# Altium PCB ESE516_PCB.PcbDoc
Units mil, origin at the board's own origin, x right, y up, seen from the top; angles counter-clockwise.
Board outline 2362.21 x 2362.21 mil, 4 copper layers (Top Layer, GroundPlane, PowerPlane, Bottom Layer), stack 58.4 mil thick; 112 components, 64 nets, 330 pads, 6 vias.
Unrouted connection lines stored in the file: 214.
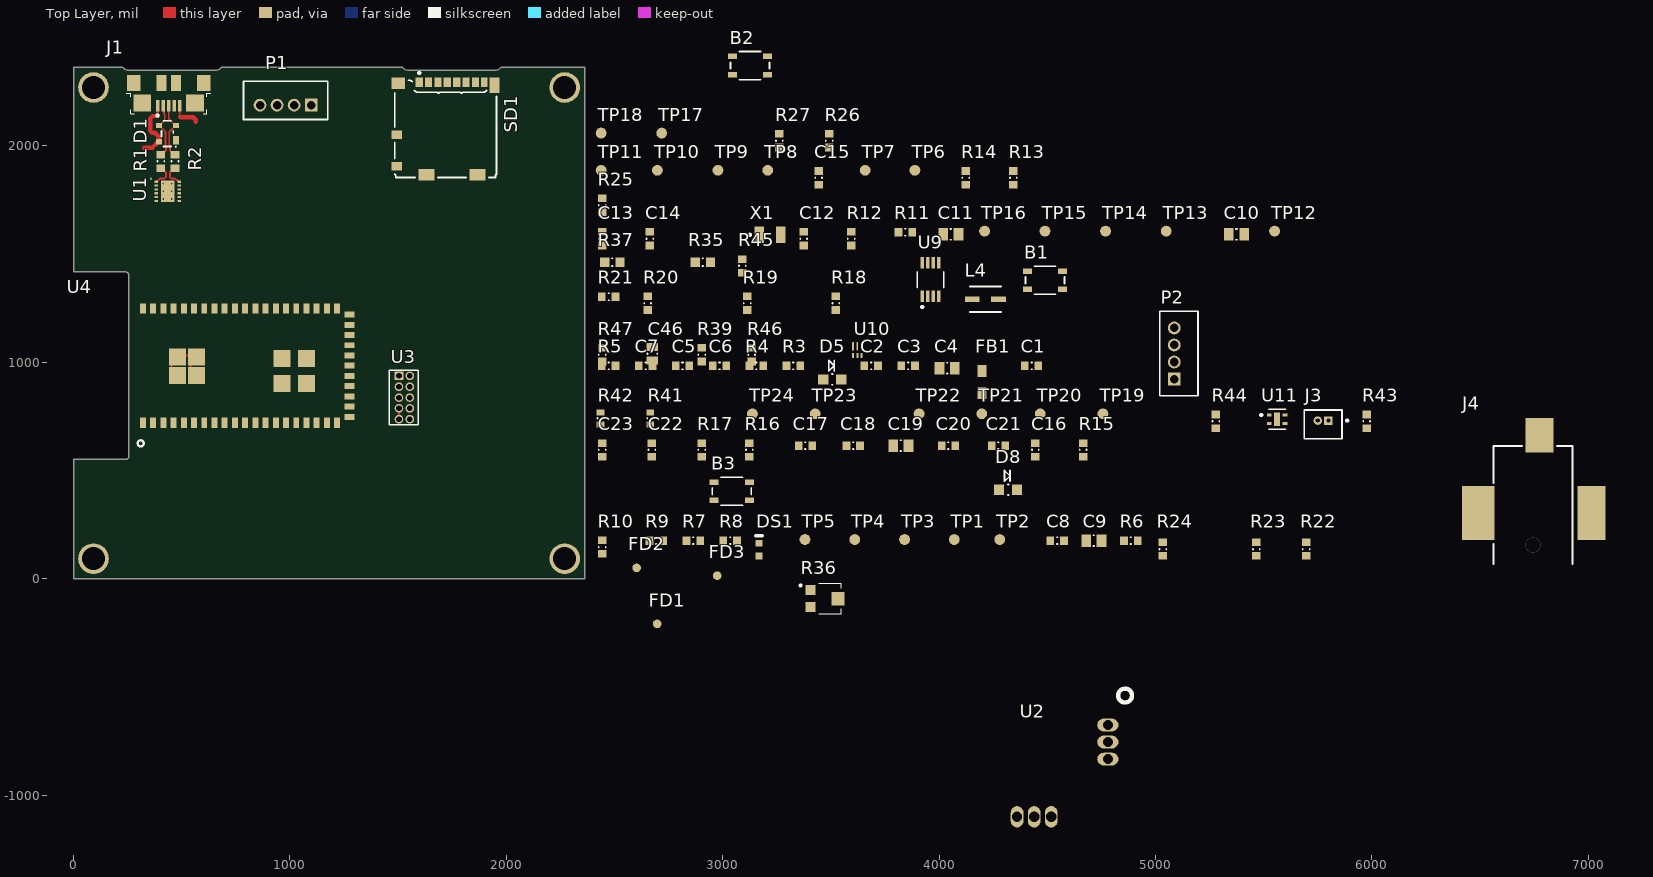
[diagram p0: Top Layer view]
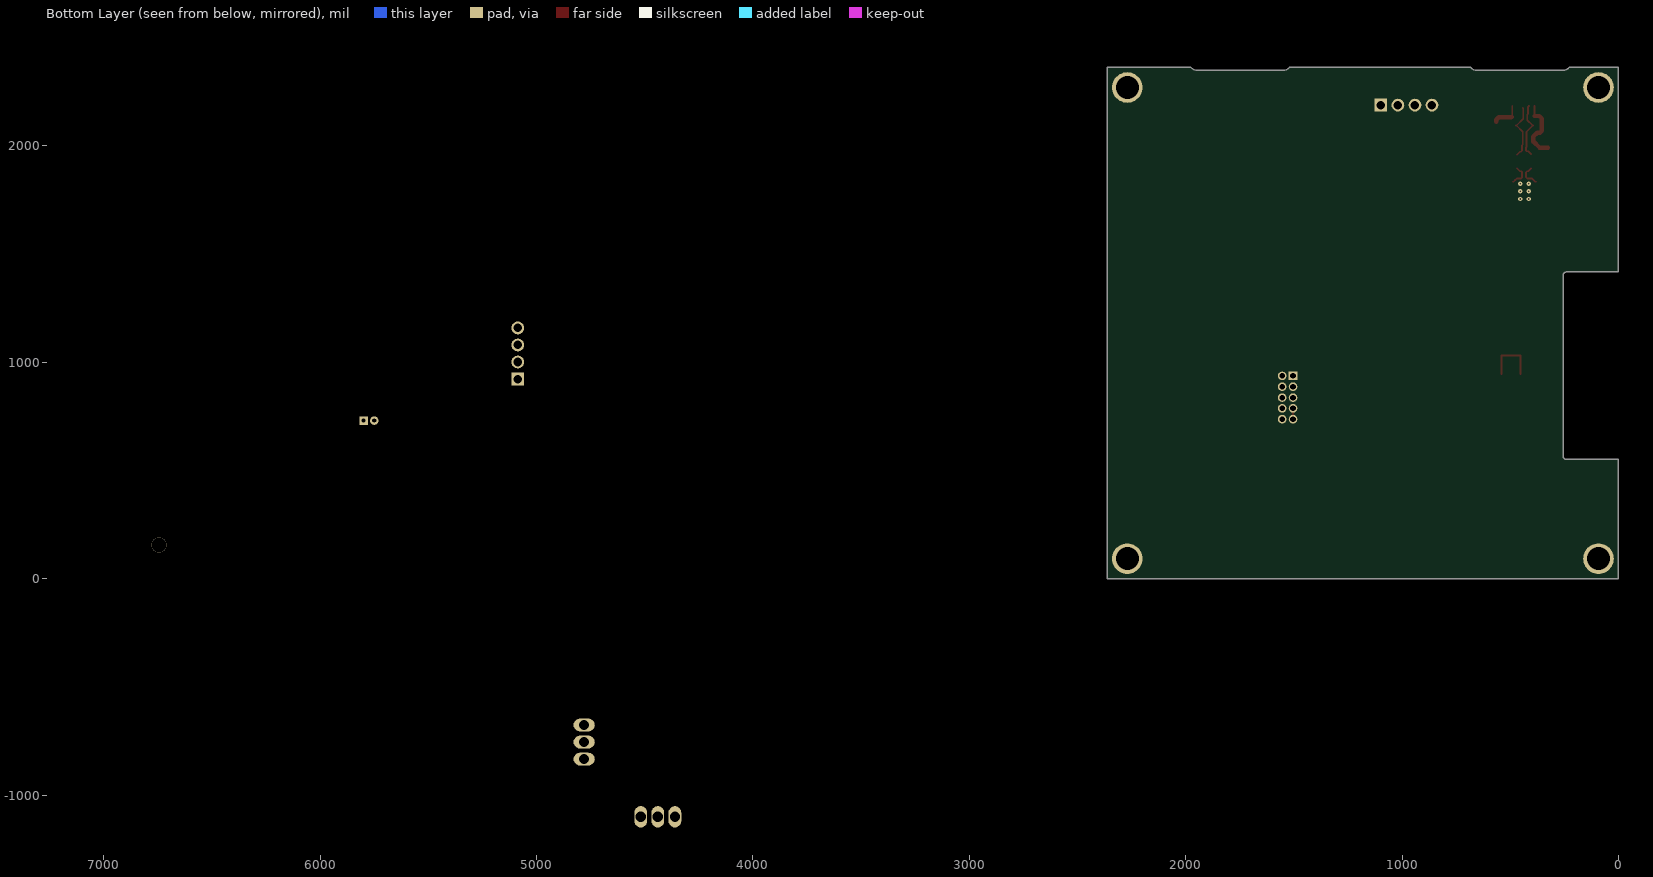
[diagram p1: Bottom Layer view, seen from below]

## Layer stack, top to bottom
Top Solder: solder mask 1, Solder Resist, Dk 3.5
Top Layer: signal copper 1.5
Dielectric1: prepreg 13, PP-006, Dk 4.1
GroundPlane: signal copper 0.7
Dielectric 2: core 28, Core-009, Dk 4.5
PowerPlane: signal copper 0.7
Dielectric 3: prepreg 13, PP-006, Dk 4.1
Bottom Layer: signal copper 1.5
Bottom Solder: solder mask 1, Solder Resist, Dk 3.5

## Board outline
240.16,551.18 0,551.18 0,0 2362.21,0 2362.2,2362.2 1975.39,2362.2 1969.06,2356.37 1961.63,2352.01 1953.45,2349.32 1944.88,2348.42 1551.18,2348.42 1542.62,2349.33 1534.45,2352.01 1527.02,2356.35 1520.67,2362.16 682.72,2362.2 676.38,2356.37 668.95,2352.01 660.77,2349.32 652.2,2348.42 258.5,2348.42 249.95,2349.33 241.77,2352.01 234.34,2356.35 227.99,2362.16 0,2362.2 0,1417.32 240.16,1417.32 243.66,1416.93 246.99,1415.77 249.98,1413.89 252.48,1411.4 254.35,1408.41 255.51,1405.08 255.91,1401.57 255.91,566.93 255.51,563.42 254.35,560.09 252.48,557.1 249.98,554.61 246.99,552.73 243.66,551.57

## Design rules (kind name [scope] priority, off if disabled: settings)
AcuteAngle [All] p1: minimum=6.00000000000000E+0001 checktracksonly=TRUE
AssemblyTestPointUsage [All] p1 off: allowmultiple=TRUE
AssemblyTestpoint [All] p1 off: testpointundercomponent=TRUE minsize=30 maxsize=100 preferedsize=60 minholesize=0 maxholesize=40 preferedholesize=32 testpointgrid=1 usegrid=FALSE gridtolerance=0.01 allowsidebottom=TRUE
BoardOutlineClearance "BoardOutlineClearance_Inner Layer" [OnLayer('GroundPlane')OR OnLayer('PowerPlane')] p1: gap=20 ignorepadtopadclearanceinfootprint=FALSE
BoardOutlineClearance BoardOutlineClearance_OuterLayers [All] p2: gap=10 ignorepadtopadclearanceinfootprint=FALSE except(20: SMDPad-OutlineEdge SMDPad-CavityEdge SMDPad-CutoutEdge THPad-OutlineEdge THPad-CavityEdge THPad-CutoutEdge)
Clearance [All] p1: gap=6 ignorepadtopadclearanceinfootprint=FALSE except(10: SMDPad-THPad)
DiffPairsRouting [All] p1: maxlimit=10 minlimit=6 mostfreqgap=10 toplayer_minwidth=6 toplayer_maxwidth=25 toplayer_prefwidth=15 midlayer1_minwidth=6 midlayer1_maxwidth=25 midlayer1_prefwidth=15 midlayer2_minwidth=6 midlayer2_maxwidth=25 midlayer2_prefwidth=15 bottomlayer_minwidth=6 bottomlayer_maxwidth=25 bottomlayer_prefwidth=15 maxuncoupledlength=500
FabricationTestPointUsage [All] p1 off: valid=0 allowmultiple=TRUE
FabricationTestpoint [All] p1 off: side=2 testpointundercomponent=TRUE minsize=30 maxsize=100 preferedsize=60 minholesize=0 maxholesize=40 preferedholesize=32 testpointgrid=1 allowsidebottom=TRUE usegrid=FALSE gridtolerance=0.01
HoleSize [All] p1: absolutevalues=TRUE maxlimit=150 minlimit=8 maxpercent=80.000 minpercent=20.000
MinimumAnnularRing [All] p1: minimumring=6
MinimumSolderMaskSliver [All] p1: minsoldermaskwidth=2
PlaneClearance [All] p1: clearance=10
PlaneConnect [All] p1: pad.planeconnectstyle=Relief pad.reliefexpansion=20 pad.reliefentries=4 pad.reliefconductorwidth=10 pad.reliefairgap=10 via.planeconnectstyle=Direct via.reliefexpansion=20 via.reliefentries=4 via.reliefconductorwidth=10 via.reliefairgap=10
PolygonConnect [All] p1: thpad.connectstyle=Relief thpad.reliefconductorwidth=10 thpad.reliefentries=4 thpad.polygonreliefangle="90 Angle" thpad.airgapwidth=8 smdpad.connectstyle=Relief smdpad.reliefconductorwidth=10 smdpad.reliefentries=4 smdpad.polygonreliefangle="90 Angle" smdpad.airgapwidth=8 via.connectstyle=Direct via.reliefconductorwidth=10 via.reliefentries=4 via.polygonreliefangle="90 Angle" via.airgapwidth=8
RoutingVias [All] p1: holewidth=8 width=20 viastyle="Through Hole" minholewidth=8 minwidth=20 maxholewidth=30 maxwidth=50
SMDNeckDown [All] p1: percent=90.000
SMDToCorner [All] p1: distance=0
SMDToPlane [All] p1: distance=0
SilkToSilkClearance [All] p1: silktosilkclearance=0
SilkToSolderMaskClearance [IsPad] p1: minsilkscreentomaskgap=2 clearancetoexposedcopper=TRUE
SolderMaskExpansion [All] p1: expansion=2 istentingtop=FALSE
UnRoutedNet [All] p1: checkbadconnections=TRUE
ViasUnderSMD [All] p1: allowed=FALSE
Width [All] p1: maxlimit=1000 minlimit=6 preferedwidth=10
18 further rules are at their usual default settings.

## Classes and differential pairs
differential pair USB_FTDI_DATA: +USB_FTDI_DATA_P -USB_FTDI_DATA_N
differential pair USB_DATA: +USB_DATA_P -USB_DATA_N

## Components (designator, comment, footprint, x,y, rotation, side; value= is the part's Value field where it differs from the comment)
B1 "PTS810 SJK 250 SMTR LFS" "PTS810 SJK 250 SMTR LFS" 4489,1379 r0 top
B2 "PTS810 SJK 250 SMTR LFS" "PTS810 SJK 250 SMTR LFS" 3126,2371 r0 top
B3 "PTS810 SJK 250 SMTR LFS" "PTS810 SJK 250 SMTR LFS" 3041.31,404.32 r0 top
C1 "100nF 16V" CAPC0603(1608)100_N 4427,983 r0 top value=100nF
C2 "10nF 16V" CAPC0603(1608)100_N 3686,983 r0 top value=10nF
C3 "100nF 16V" CAPC0603(1608)100_N 3857,983 r0 top value=100nF
C4 "4.7uF 16V" CAPC0805(2012)145_N 4037,973 r0 top value=4.7uF
C5 "47pF 16V" CAPC0603(1608)100_N 2814,983 r0 top value=47pF
C6 "47pF 16V" CAPC0603(1608)100_N 2985,983 r0 top value=47pF
C7 "100nF 16V" CAPC0603(1608)100_N 2644,983 r0 top value=100nF
C8 "CAP 120pF" CAPC0603(1608)100_N 4545,176 r0 top value=120pF
C9 "4.7uF 16V" CAPC0805(2012)145_N 4715,176 r0 top value=4.7uF
C10 "10uF 16V" CAPC0805(2012)145_N 5374,1591 r0 top value=10uF
C11 "CAP 10uF 16V" CAPC0805(2012)145_N 4054,1591 r0 top value=10uF
C12 "1uF 16V" CAPC0603(1608)100_N 3374,1571 r90 top value=1uF
C13 "18pF 16V" CAPC0603(1608)100_N 2443,1571 r90 top value=18pF
C14 "18pF 16V" CAPC0603(1608)100_N 2663,1571 r90 top value=18pF
C15 "CAP 100nF 16V 0603(1608)" CAPC0603(1608)100_N 3443,1852 r90 top value=100nF
C16 "1uF 16V" CAPC0603(1608)100_N 4445,595 r90 top value=1uF
C17 "1uF 16V" CAPC0603(1608)100_N 3382,615 r0 top value=1uF
C18 "100nF 16V" CAPC0603(1608)100_N 3603,615 r0 top value=100nF
C19 "CAP 10uF" CAPC0805(2012)145_N 3823,615 r0 top value=10uF
C20 "100nF 16V" CAPC0603(1608)100_N 4043,615 r0 top value=100nF
C21 "1uF 16V" CAPC0603(1608)100_N 4274,615 r0 top value=1uF
C22 "100nF 16V" CAPC0603(1608)100_N 2673,595 r90 top value=100nF
C23 "1uF 16V" CAPC0603(1608)100_N 2443,595 r90 top value=1uF
C46 "CAP 22uF" CAPC0805(2012)100_L 2675,1039 r90 top value=22uF
D1 "PRTR5V0U2X,215" NXP-SOT143B-4_V 433.88,2056.53 r180 top
D5 "LTST-C170CKT" LTST-C170CKT_V 3506,921 r0 top
D8 "LTST-C170GKT" LTST-C170GKT_V 4318.34,411 r0 top
DS1 "LTST-C191KGKT" LITE-ON-LTST-C191KRKT-2_V 3168,134 r90 top
FB1 "BLM21PG221SN1D" MURA-BLM21-B20-CHIP-2_V2 4198,909 r90 top
FD1 "40x100mm" Fiducial_FT 2697,-209 r0 top
FD2 "40x100mm" Fiducial_FT 2602,50 r0 top
FD3 "40x100mm" Fiducial_FT 2974,14 r0 top
J1 "ZX62R-B-5P" HIRO-ZX62R-B-5P_V 439.58,2237.34 r180 top
J3 "53047-0210" FP-53047-0210-MFG 5774,713 r0 top
J4 "RASM722PTR13X" FP-RASM722PTR13X-MFG 6744,323 r0 top
L4 "470nH 15mohm" INDPM3630X150N 4214,1291 r0 top
P1 "B4B-PH-K-S(LF)(SN)" JST-B4B-PH-K-S_V 980,2210 r180 top
P2 "B4B-PH-K-S(LF)(SN)" JST-B4B-PH-K-S_V 5107.65,1040.63 r90 top
R1 "27R 1%" RESC0603(1608)_N 404,1928 r270 top value="27.00 Ohm"
R2 "27R 1%" RESC0603(1608)_N 469,1928 r270 top value="27.00 Ohm"
R3 "1K 1%" RESC0603(1608)_N 3326,983 r0 top value="1000.00 Ohm"
R4 "Jumper" RESC0603(1608)_N 3155,983 r0 top value="0.00 Ohm"
R5 "1K 1%" RESC0603(1608)_N 2473,983 r0 top value="1000.00 Ohm"
R6 "1K1 1%" RESC0603(1608)_N 4886,176 r0 top value="1100.00 Ohm"
R7 "1K 1%" RESC0603(1608)_N 2864,176 r0 top value="1000.00 Ohm"
R8 "27R 1%" RESC0603(1608)_N 3034,176 r0 top value="27.00 Ohm"
R9 "27R 1%" RESC0603(1608)_N 2693,176 r0 top value="27.00 Ohm"
R10 "27R 1%" RESC0603(1608)_N 2443,146 r90 top value="27.00 Ohm"
R11 "10K 1%" RESC0603(1608)_N 3844,1601 r0 top value="10000.00 Ohm"
R12 "100R 1%" RESC0603(1608)_N 3594,1571 r90 top value="100.00 Ohm"
R13 "10K 1% 0603(1608)" RESC0603(1608)_N 4343,1852 r90 top value="10000.00 Ohm"
R14 "10K 1% 0603(1608)" RESC0603(1608)_N 4123,1852 r90 top value="10000.00 Ohm"
R15 "Jumper" RESC0603(1608)_N 4665,595 r90 top value="0.00 Ohm"
R16 "Jumper" RESC0603(1608)_N 3123,595 r90 top value="0.00 Ohm"
R17 "Jumper" RESC0603(1608)_N 2903,595 r90 top value="0.00 Ohm"
R18 "10K 1%" RESC0603(1608)_N 3523,1273 r90 top value="10000.00 Ohm"
R19 "100R 1%" RESC0603(1608)_N 3113,1273 r90 top value="100.00 Ohm"
R20 "10K 1%" RESC0603(1608)_N 2653,1273 r90 top value="10000.00 Ohm"
R21 "10K 1%" RESC0603(1608)_N 2473,1303 r0 top value="10000.00 Ohm"
R22 "1K1 1%" RESC0603(1608)_N 5696,137 r90 top value="1100.00 Ohm"
R23 "1K1 1%" RESC0603(1608)_N 5466,137 r90 top value="1100.00 Ohm"
R24 "Jumper" RESC0603(1608)_N 5034,137 r90 top value="0.00 Ohm"
R25 "1K1 1%" RESC0603(1608)_N 2443,1726 r90 top value="1100.00 Ohm"
R26 "10K 1%" RESC0603(1608)_N 3492,2024 r90 top value="10000.00 Ohm"
R27 "100R 1%" RESC0603(1608)_N 3262,2024 r90 top value="100.00 Ohm"
R35 "100R 1%" RESC0603(1608)_M 2908,1463 r0 top value="100.00 Ohm"
R36 "TC33X-2-102E" TRIM_TC33X-2-102E 3476,-92 r0 top
R37 "100R 1%" RESC0603(1608)_M 2490,1463 r0 top value="100.00 Ohm"
R39 "453K 1%" RESC0603(1608)_N 2903,1035 r90 top value="453000.00 Ohm"
R41 "2K2 1%" RESC0603(1608)_L 2665,741 r90 top value="2200.00 Ohm"
R42 "2K2 1%" RESC0603(1608)_L 2435,741 r90 top value="2200.00 Ohm"
R43 "Jumper" RESC0603(1608)_N 5975,727 r90 top value="0.00 Ohm"
R44 "Jumper" RESC0603(1608)_N 5279,727 r90 top value="0.00 Ohm"
R45 "Jumper" RESC0603(1608)_N 3091,1445 r90 top value="0.00 Ohm"
R46 "100K 1%" RESC0603(1608)_N 3133,1035 r90 top value="100000.00 Ohm"
R47 "100K 1%" RESC0603(1608)_N 2443,1035 r90 top value="100000.00 Ohm"
SD1 "104031-0811" MOLX-104031-0811_V 1720,2080 r180 top locked
TP1 "0.1\" Pad" PCBComponent 4070,181 r90 top
TP2 "0.1\" Pad" PCBComponent 4280,181 r90 top
TP3 "0.1\" Pad" PCBComponent 3840,181 r90 top
TP4 "0.1\" Pad" PCBComponent 3610,181 r90 top
TP5 "0.1\" Pad" PCBComponent 3380,181 r90 top
TP6 "0.1\" Pad" PCBComponent 3888,1887 r90 top
TP7 "0.1\" Pad" PCBComponent 3658,1887 r90 top
TP8 "0.1\" Pad" PCBComponent 3208,1887 r90 top
TP9 "0.1\" Pad" PCBComponent 2978,1887 r90 top
TP10 "0.1\" Pad" PCBComponent 2698,1887 r90 top
TP11 "0.1\" Pad" PCBComponent 2438,1887 r90 top
TP12 "0.1\" Pad" PCBComponent 5550,1606 r90 top
TP13 "0.1\" Pad" PCBComponent 5049,1606 r90 top
TP14 "0.1\" Pad" PCBComponent 4769,1606 r90 top
TP15 "0.1\" Pad" PCBComponent 4489,1606 r90 top
TP16 "0.1\" Pad" PCBComponent 4210,1606 r90 top
TP17 "0.1\" Pad" PCBComponent 2718,2059 r90 top
TP18 "0.1\" Pad" PCBComponent 2438,2059 r90 top
TP19 "0.1\" Pad" PCBComponent 4757,762 r90 top
TP20 "0.1\" Pad" PCBComponent 4467,762 r90 top
TP21 "0.1\" Pad" PCBComponent 4197,762 r90 top
TP22 "0.1\" Pad" PCBComponent 3907,762 r90 top
TP23 "0.1\" Pad" PCBComponent 3427,762 r90 top
TP24 "0.1\" Pad" PCBComponent 3137,762 r90 top
U1 "FT234XD-R" DFN-12_V 434.85,1789.71 r0 top
U2 "2 axis joystick" JOYSTICK 4439,-755 r0 top
U3 "20021111-00010T4LF" 20021111-00010T4LF 1554,837 r270 top
U4 "SAMW25H18-MR510PB" SAMW25H18-MR510PB 797.83,984.25 r180 top locked
U9 "PAM8302AASCR" FP-MSOP-8-MFG 3960,1382 r90 top
U10 "TPS62827DMQR" TPS62827DMQR 3622,1056 r90 top
U11 "SHTC3" FP-SHTC3-MFG 5562,737 r0 top
X1 "ABS07-32.768KHz-T" ABRA-ABS07-2_V 3218,1589 r0 top

## Footprints (in the part's own frame and the unit in brackets; to place one, negate y for a bottom-side part, rotate by r counter-clockwise, add the part's x,y. Pads: shape width x height; smd on the part's side, far side on the other; paste and mask are expansions set on the pad)
20021111-00010T4LF [mil] "CONN HEADER 10POS UNSHD VERT T/H"
  rect 39.6x39.6 hole 25.6: 1(-100,-50)
  round 39.6 hole 25.6: 2(-100,0) 3(-50,-50) 4(-50,0) 5(0,-50) 6(0,0) 7(50,-50) 8(50,0) 9(100,-50) 10(100,0)
  silkscreen extent -125,-95 125,40, body extent -125,-92 125,42, height 217
ABRA-ABS07-2_V [mm] "Hand Drawn, 2-Leads, Body 3.2x1.5mm, Pitch 2.5mm"
  rect 1.1x1.9 smd: 1(-1.25,0) 2(1.25,0)
  silkscreen extent -2.47,-0.12 -2.22,0.12, body extent -1.6,-0.75 1.6,0.75, height 0.9
CAPC0603(1608)100_N [mm] "Chip Capacitor, Body 1.6x0.8mm, Height 1.0mm, IPC Medium Density"
  rect 0.9x1 smd: 1(-0.8,0) 2(0.8,0)
  silkscreen extent -0.05,-0.4 0.05,0.4, body extent -0.87,-0.48 0.88,0.47, height 1
CAPC0805(2012)100_L [mm] "Chip Capacitor, Body 2.0x1.2mm, Height 1.0mm, IPC High Density"
  rect 0.95x1.35 smd: 1(-0.8,0) 2(0.8,0)
  silkscreen extent -0.05,-0.58 0.05,0.58, body extent -1.1,-0.72 1.1,0.72, height 1
CAPC0805(2012)145_N [mm] "Chip Capacitor, Body 2.0x1.2mm, Height 1.45mm, IPC Medium Density"
  rect 1.15x1.45 smd: 1(-0.9,0) 2(0.9,0)
  silkscreen extent -0.05,-0.62 0.05,0.63, body extent -1.1,-0.72 1.1,0.73, height 1.45
DFN-12_V [mm] "SON, 12-Leads, Body 3x3mm, Pitch 0.45mm, Thermal Pad 2.5x1.6mm"
  rect 0.4x0.25 smd: 1(-1.35,1.125) 2(-1.35,0.675) 3(-1.35,0.225) 4(-1.35,-0.225) 5(-1.35,-0.675) 6(-1.35,-1.125) 7(1.35,-1.125) 8(1.35,-0.675) 9(1.35,-0.225) 10(1.35,0.225) 11(1.35,0.675) 12(1.35,1.125)
  rect 1.6x2.5 smd mask+0.102: 13(0,0)
  silkscreen extent -2,1.45 -1.9,1.55, body extent -1.5,-1.5 1.5,1.5, height 0.9
Fiducial_FT [mil]
  round 40 smd paste-30 mask+30: ""(0,0)
FP-53047-0210-MFG [mm]
  rect 1x1 hole 0.5 paste-1000 mask+0: 1(0.625,0.45)
  round 1 hole 0.5 paste-1000 mask+0: 2(-0.625,0.45)
  silkscreen extent -2.22,-1.7 2.95,1.7, body extent -2.32,-1.8 2.32,1.8, height 0.25
FP-MSOP-8-MFG [mm]
  rect 1.35x0.45 smd paste+0 mask+0: 1(-1.975,0.975) 2(-1.975,0.325) 3(-1.975,-0.325) 4(-1.975,-0.975) 5(1.975,-0.975) 6(1.975,-0.325) 7(1.975,0.325) 8(1.975,0.975)
  silkscreen extent -3.35,-1.55 0.92,1.55, body extent -2.75,-1.65 2.75,1.65, height 0.25
FP-RASM722PTR13X-MFG [mm]
  rect 3.3x4.06 smd paste+0 mask+0: 1(0.76,8.65)
  rect 3.81x6.35 smd paste+0 mask+0: 2(-6.43,-0.49)
  rect 3.3x6.35 smd paste+0 mask+0: 3(6.86,-0.49)
  round 1.78 hole 1.78 unplated paste-1000 mask+0: ""(0,-4.25)
  silkscreen extent -4.63,-6.5 4.63,7.38, body extent -8.43,-7.48 8.61,10.78, height 0.25
FP-SHTC3-MFG [mm]
  rect 0.55x0.35 smd paste-1000 mask-1000: 1(-0.925,0.5) 2(-0.925,-0.5) 3(0.925,-0.5) 4(0.925,0.5)
  rect 0.7x1.6 smd paste-1000 mask+0: 5(0,0)
  silkscreen extent -2,-1.17 1,1.17, body extent -1.4,-1.1 1.4,1.1, height 0.25
HIRO-ZX62R-B-5P_V [mm] "USB Micro-B R/A Connector"
  rect 0.4x1.35 smd: 1(1.3,1.338) 2(0.65,1.338) 3(0,1.338) 4(-0.65,1.338) 5(-1.3,1.338)
  rect 2.1x2 smd: 6(-3.1,1.012) 11(3.1,1.012)
  rect 1.6x1.9 smd: 7(-4.1,-1.338) 10(4.1,-1.338)
  rect 1.2x1.9 smd: 8(-0.85,-1.338) 9(0.85,-1.338)
  silkscreen extent -4.95,-0.13 4.95,2.58, body extent -4.4,-3.95 4.4,1.78, height 2.71
INDPM3630X150N [mm]
  rect 1.75x0.6 smd: 1(-1.55,0) 2(1.55,0)
  silkscreen extent -1.83,-1.5 1.83,1.5, body extent -1.83,-1.5 1.83,1.5, height 1.5
JOYSTICK [mm]
  oval 2.5x1.5 hole 1.2: 1(8.65,2) 2(8.65,0) 3(8.65,-2)
  oval 1.5x2.5 hole 1.2: 4(2,-8.775) 5(0,-8.775) 6(-2,-8.775)
  silkscreen extent 9.86,4.65 11.48,6.27, body extent -8.85,-8.98 8.85,8.98, height 3.5
JST-B4B-PH-K-S_V [mm] "Connector, 4-Leads, Body 9.9x4.5mm, Pitch 2mm"
  rect 1.5x1.5 hole 1: 1(-3,0.55)
  round 1.5 hole 1: 2(-1,0.55) 3(1,0.55) 4(3,0.55)
  silkscreen extent -4.95,-2.25 4.95,2.25, body extent -4.95,-2.25 4.95,2.25, height 6
LITE-ON-LTST-C191KRKT-2_V [mm] "Chip, 2-Leads, Body 1.6x0.8mm"
  rect 0.8x0.8 smd: 1(-0.75,0) 2(0.75,0)
  silkscreen extent 1.65,-0.4 1.65,0.4, body extent -0.8,-0.4 0.8,0.4, height 0.55
LTST-C170CKT_V [mm] "SMD, 2-Leads, Body 2x1.25mm"
  rect 1.2x1.2 smd: 1(-1.05,0) 2(1.05,0)
  silkscreen extent -0.41,-0.63 0.23,2.25, body extent -1,-0.63 1,0.63, height 1.1
LTST-C170GKT_V [mm] "SMD, 2-Leads, Body 2x1.25mm"
  rect 1.2x1.2 smd: 1(-1.05,0) 2(1.05,0)
  silkscreen extent -0.41,-0.63 0.23,2.25, body extent -1,-0.63 1,0.63, height 1.1
MOLX-104031-0811_V [mm] "Micro SD, 8-Leads, Body 11.95x11.4mm, Pitch 1.1mm"
  rect 0.85x1.1 smd: 1(3.113,-5.412) 2(2.013,-5.412) 3(0.913,-5.412) 4(-0.188,-5.412) 5(-1.288,-5.412) 6(-2.387,-5.412) 7(-3.487,-5.412)
  rect 0.75x1.1 smd: 8(-4.537,-5.412)
  rect 1.2x1 smd: 9(5.748,0.738) 10(5.748,4.438)
  rect 1.55x1.35 smd: 11(5.573,-5.287)
  rect 1.17x1.8 smd: 12(-5.747,-5.062)
  rect 1.9x1.35 smd: 13(-3.722,5.413) 14(2.248,5.413)
  silkscreen extent -5.97,-6.64 5.98,5.74, body extent -5.97,-5.66 5.98,5.74, height 1.45
MURA-BLM21-B20-CHIP-2_V2 [mm] "Chip Ferrite Bead, 2-Leads, Body 2x1.25mm, Height 1.05mm, 35/70um Land Pad Thickness, 2A Rated Current"
  rect 1.4x1 smd: 1(-1.3,0) 2(1.3,0)
  body extent -1,-0.63 1,0.63, height 1.05
NXP-SOT143B-4_V [mm] "SOT143, 4-Leads, Body 3x1.4mm"
  rect 0.7x1 smd: 1(-1,0.75)
  rect 0.7x0.6 smd: 2(-1,-0.95) 3(1,-0.95) 4(1,0.95)
  silkscreen extent -1.05,-1.5 0.7,1.6, body extent -0.7,-1.5 0.7,1.5, height 1.1
PCBComponent [mil]
  round 50 smd mask+0: 1(0,0)
  body extent -25,-25 25,25, height 0
"PTS810 SJK 250 SMTR LFS" [mm] "SWITCH TACTILE SPST-NO 0.05A 16V"
  rect 1.05x0.65 smd: 1(-2.075,1.075) 2(2.075,1.075) 3(-2.075,-1.075) 4(2.075,-1.075)
  silkscreen extent -2.29,-1.65 2.29,1.65, body extent -2.3,-1.6 2.3,1.6, height 2.5
RESC0603(1608)_L [mm] "Chip Resistor, Body 1.6x0.8mm, IPC High Density"
  rect 0.7x0.9 smd: 1(-0.7,0) 2(0.7,0)
  silkscreen extent -0.05,-0.35 0.05,0.35, body extent -0.85,-0.47 0.85,0.47, height 0.6
RESC0603(1608)_M [mm] "Chip Resistor, Body 1.6x0.8mm, IPC Low Density"
  rect 1.1x1.1 smd: 1(-0.9,0) 2(0.9,0)
  silkscreen extent -0.05,-0.45 0.05,0.45, body extent -0.85,-0.47 0.85,0.47, height 0.6
RESC0603(1608)_N [mm] "Chip Resistor, Body 1.6x0.8mm, IPC Medium Density"
  rect 0.9x1 smd: 1(-0.8,0) 2(0.8,0)
  silkscreen extent -0.05,-0.4 0.05,0.4, body extent -0.85,-0.47 0.85,0.47, height 0.6
SAMW25H18-MR510PB [mm] "RF TXRX MODULE WIFI TRACE ANT"
  rect 2x2 smd: 0(-7.065,-0.839) 0(-7.065,2.085) 0(-4.21,-0.839) 0(-4.21,2.085)
  rect 2x2 smd mask+0.127: 0(5.828,-1.045) 0(5.828,1.137) 0(8.046,-1.045) 0(8.046,1.137)
  rect 0.7x1.2 smd: 1(12.121,6.7) 2(10.921,6.7) 3(9.721,6.7) 4(8.521,6.7) 5(7.321,6.7) 6(6.121,6.7) 7(4.921,6.7) 8(3.721,6.7) 9(2.521,6.7) 10(1.321,6.7) 11(0.121,6.7) 12(-1.079,6.7) 13(-2.279,6.7) 14(-3.479,6.7) 15(-4.679,6.7) 16(-5.879,6.7) 17(-7.079,6.7) 18(-8.279,6.7) 19(-9.479,6.7) 20(-10.679,6.7) 32(-10.679,-6.7) 33(-9.479,-6.7) 34(-8.279,-6.7) 35(-7.079,-6.7) 36(-5.879,-6.7) 37(-4.679,-6.7) 38(-3.479,-6.7) 39(-2.279,-6.7) 40(-1.079,-6.7) 41(0.121,-6.7) 42(1.321,-6.7) 43(2.521,-6.7) 44(3.721,-6.7) 45(4.921,-6.7) 46(6.121,-6.7) 47(7.321,-6.7) 48(8.521,-6.7) 49(9.721,-6.7) 50(10.921,-6.7) 51(12.121,-6.7)
  rect 1.2x0.7 smd: 21(-12.12,6.004) 22(-12.12,4.804) 23(-12.12,3.604) 24(-12.12,2.404) 25(-12.12,1.204) 26(-12.12,0.004) 27(-12.12,-1.196) 28(-12.12,-2.396) 29(-12.12,-3.596) 30(-12.12,-4.796) 31(-12.12,-5.996)
  silkscreen extent 12.02,8.76 12.74,9.48, body extent -12.89,-7.45 20.98,7.46, height 3.37
TPS62827DMQR [mm]
  rrect50% 0.6x0.25 smd: 1(-0.65,0.5) 2(-0.65,0) 3(-0.65,-0.5)
  rrect50% 1x0.2 smd: 4(0.45,-0.5) 5(0.45,0) 6(0.45,0.5)
TRIM_TC33X-2-102E [mm]
  rect 1.2x1.2 smd: 1(-1.8,1) 3(-1.8,-1)
  rect 1.5x1.6 smd: 2(1.45,0)
  silkscreen extent -3.07,-1.8 1.8,1.8, body extent -1.9,-1.5 1.9,1.5, height 1.1

## Part data
B1 B2 B3: "SWITCH TACTILE SPST-NO 0.05A 16V Tactile Switch SPST-NO Top Actuated Surface Mount", Color=White, Current Rating="50 mA", Manufacturer="ITT /  C&K Components", Manufacturer Part Number=PTS810SJK250SMTRLFS, Operating Force="2.6 N", Operating Temperature Range="- 40 C to + 85 C", Supplier Part Number 1=CKN10503CT-ND, Voltage Rating DC="16 VDC", Actuator=Oval, Brand="C&K Components", ComponentLink1Description=https://datasheet.ciiva.com/18514/pts810-4mar13-18514061.pdf, ComponentLink1URL=https://datasheet.ciiva.com/18514/pts810-4mar13-18514061.pdf, ComponentLink2Description=https://datasheet.ciiva.com/18514/pts810-4mar13-18514062.pdf, ComponentLink2URL=https://datasheet.ciiva.com/18514/pts810-4mar13-18514062.pdf, ComponentLink3Description=https://datasheet.ciiva.com/18514/pts810-4mar13-18514063.pdf, ComponentLink3URL=https://datasheet.ciiva.com/18514/pts810-4mar13-18514063.pdf, Contact Form=SPST, Contact Plating=Silver, Factory Pack Quantity=2900, Mounting Direction=Straight, Mounting Style=SMD/SMT, Packaging=Reel, Part # Aliases=Y97LT25B5DBFP, Product Category="Tactile Switches", RoHS=Details, Series=PTS810, Stem Height="2.5 mm", Supplier 1=Digi-Key, Switch Function="OFF - (ON)", Termination Style="J Form Lead", Travel="0.15 mm"
C1 C3 C7 C15 C18 C20 C22: library part CMP-1035-02584-1, "CAP 100nF 16V ±10% 0603 (1608 Metric) Thickness 1mm SMD", Case-EIA=0603, Case-Metric=1608, Rated Voltage="16 V", Tolerance=Â±10%, Max Thickness="1 mm", Technology=SMT
C2: library part CMP-1035-02311-1, "CAP 10nF 16V ±10% 0603 (1608 Metric) Thickness 1mm SMD", Case-EIA=0603, Case-Metric=1608, Rated Voltage="16 V", Tolerance=Â±10%, Max Thickness="1 mm", Technology=SMT
C4 C9: library part CMP-1036-04893-1, "CAP 4.7uF 16V -20% to +80% 0805 (2012 Metric) Thickness 1.45mm SMD", Case-EIA=0805, Case-Metric=2012, Rated Voltage="16 V", Tolerance="-20% to +80%", Max Thickness="1.45 mm", Technology=SMT
C5 C6: library part CMP-1035-01048-1, "CAP 47pF 16V ±0.5pF 0603 (1608 Metric) Thickness 1mm SMD", Case-EIA=0603, Case-Metric=1608, Rated Voltage="16 V", Tolerance=Â±0.5pF, Max Thickness="1 mm", Technology=SMT
C8: library part CMP-1035-01302-1, "CAP 120pF 10V ±1% 0603 (1608 Metric) Thickness 1mm SMD", Case-EIA=0603, Case-Metric=1608, Rated Voltage="10 V", Tolerance=Â±1%, Max Thickness="1 mm", Technology=SMT
C10 C11 C19: library part CMP-1036-04927-1, "CAP 10uF 16V ±10% 0805 (2012 Metric) Thickness 1.45mm SMD", Case-EIA=0805, Case-Metric=2012, Rated Voltage="16 V", Tolerance=Â±10%, Max Thickness="1.45 mm", Technology=SMT
C12 C16 C17 C21 C23: library part CMP-1035-02736-1, "CAP 1uF 16V ±5% 0603 (1608 Metric) Thickness 1mm SMD", Case-EIA=0603, Case-Metric=1608, Rated Voltage="16 V", Tolerance=Â±5%, Max Thickness="1 mm", Technology=SMT
C13 C14: library part CMP-1035-00738-1, "CAP 18pF 16V ±5% 0603 (1608 Metric) Thickness 1mm SMD", Case-EIA=0603, Case-Metric=1608, Rated Voltage="16 V", Tolerance=Â±5%, Max Thickness="1 mm", Technology=SMT
C46: library part CMP-1036-04944-1, "CAP 22uF 10V ±20% 0805 (2012 Metric) Thickness 1mm SMD", Case-EIA=0805, Case-Metric=2012, Rated Voltage="10 V", Tolerance=Â±20%, Max Thickness="1 mm", Technology=SMT
D1: library part CMP-2000-05285-1, "Ultra Low Capacitance Double Rail-to-Rail ESD Protection Diode, 5.5 V, 1 pF, -40 to 85 degC, 4-Pin SOT143B, RoHS, Tape and Reel", Capacitance Value=16pF, ESD Protection Voltage=8KV@ContactDisc, Leakage Current=0.1uA, Manufacturer="NXP Semiconductors", Operating Temperature Classification=Industrial, Operating Temperature Max Deg. C=85C, Operating Temperature Min Deg. C=-40C, Operating Temp Range=-40Cto85C, Package / Case=SOT, Reverse Breakdown Voltage=6V, Reverse Stand-off Voltage=5.5V, Configuration=Quad, Datasheet URL=https://datasheet.ciiva.com/4479/prtr5v0u2x-102853-4479461.pdf, Datasheet Version="Rev. 02, 01/2008", Direction Type=Uni-Directional, Leakage Current (Max)=0.1uA, Manufacturer URL=http://www.nxp.com/, Mounting=SurfaceMount, Mounting Style=SurfaceMount, Number of Elements=1, Package Type=SOT, Packaging=TapeandReel, Pin Count=3+Tab, Polarity=Uni-Directional, Product Depth (mm)=1.4mm, Product Height (mm)=1mm, Product Length (mm)=3mm, Rad Hardened=No, Suppressor Type=DiodeArrays, Working Voltage=5.5V, Working Voltage (Max)=5.5V
D5: library part CMP-1674-00001-5, "LED Uni-Color Red, 100 mW, 200 mA, -55 to 85 degC, 2-Pin SMD, RoHS, Tape and Reel", Colour=Red, Manufacturer=Lite-On, Max Operating Temperature="85 degC", Min Operating Temperature="-55 degC", Package Quantity=3000, ComponentLink1Description="Manufacturer URL", ComponentLink1URL=http://www.us.liteon.com/, ComponentLink2Description=Datasheet, ComponentLink2URL=http://media.digikey.com/pdf/Data%20Sheets/Lite-On%20PDFs/LTST-C170CKT.pdf, DatasheetVersion=03/2003, Height="1.1 mm", Length="2 mm", Mount="Surface Mount", Mounting Technology="Surface Mount", PackageDescription="2-Pin Surface Mount Device, Body 2 x 1.25 mm", PackageReference=C170CKT, Packaging="Tape and Reel", Pins=2, RoHSCompliant=true
D8: library part CMP-1674-00002-5, "LED Uni-Color Green, 100 mW, 120 mA, -55 to 85 degC, 2-Pin SMD, RoHS, Tape and Reel", Colour=Green, Manufacturer=Lite-On, Max Operating Temperature="85 degC", Min Operating Temperature="-55 degC", Package Quantity=1, ComponentLink1Description="Manufacturer URL", ComponentLink1URL=http://www.us.liteon.com/, ComponentLink2Description=Datasheet, ComponentLink2URL=http://media.digikey.com/pdf/Data%20Sheets/Lite-On%20PDFs/LTST-C170GKT.pdf, DatasheetVersion=03/2003, Height="1.1 mm", Length="2 mm", Mount="Surface Mount", Mounting Technology="Surface Mount", PackageDescription="2-Pin Surface Mount Device, Body 2 x 1.25 mm", PackageReference=C170GKT, Packaging="Tape and Reel", Pins=2, RoHSCompliant=true
DS1: library part CMP-2000-05198-1, "Chip LED, Green, 574 nm, 40 pF, -55 to 85 degC, 2-Pin SMD, RoHS, Tape and Reel", Emitting Color=YellowGreen, Forward Current=30mA, Forward Voltage=2.4V, Manufacturer=Lite-On, Operating Temp Range=-55Cto85C, Operating Temperature Classification=Industrial, Package Type=ChipLed, Power Dissipation=75W, Reverse Voltage=5V, Test Current (It)=20mA, Chip Material=AlGaInP, Datasheet URL=http://download.siliconexpert.com/pdfs/2007/08/26/semi_b/manual/lot/ds/ltst-c191kgkt.pdf, Datasheet Version=Jan-07, DELETED=Compliant, Dominant Wave Length=571nm, High Brightness=Yes, Lens Dimensions=1.1X0.8X0.37mm, Lum Intensity=35mcd, Luminous Intensity=35mcd, Main Category=ChipLED, Manufacturer URL=http://www.us.liteon.com/, Mounting=SurfaceMount, Number of Elements=1, Packaging=TapeandReel, Peak Wavelength=574nm, Pin Count=2, Product Depth (mm)=0.8mm, Product Height (mm)=0.55mm, Product Length (mm)=1.6mm, Rad Hardened=No, Shape Type=Rectangular, Type=Uni-Color, Viewing Angle=130deg
FB1: library part CMP-0686-00610-2, "Chip Ferrite Bead for Power Lines, 220 Ohm, 2000 mA, -55 to 125 degC, 2 x 1.25 x 1.05 mm SMD, Tape and Reel", DC Resistance="0.045 Ohm Max.", Manufacturer=Murata, Operating Temperature Range="-55 to 125 degC", Rated Current="2000 mA", ComponentLink1Description="Manufacturer URL", ComponentLink1URL=http://www.murata.com/, ComponentLink2Description=Datasheet, ComponentLink2URL=http://www.murata.com/products/catalog/pdf/c31e.pdf, ComponentLink3Description="Package Specification", ComponentLink3URL=http://www.murata.com/products/catalog/pdf/c31e.pdf, DatasheetVersion=08/2013, Impedance (at 100 MHz)="220 Ohm +/- 25%", Mounting Technology="Surface Mount", PackageDescription="2-Pin Chip, Body 2 x 1.25 mm", PackageReference=BLM21_H1050-2, Packing="Tape and Reel", PartNumber=BLM21PG221SN1D
FD1 FD2 FD3: library part CMP-00174-A.4, "Fiducial 40x100mm"
J1: library part CMP-0031-00001-1, "Connector; USBMicro-B,Reverse type, SMT; 5 Position; Right Angle", Operating Temperature="-30 to 85 degC", ComponentLink1Description="Manufacturer URL", ComponentLink1URL=http://www.hirose.com/â€Ž, ComponentLink2Description=Datasheet, ComponentLink2URL=http://www.hirose.co.jp/cataloge_hp/e24200011.pdf, DatasheetVersion=08/2010, Mounting Technology="Surface Mount", PackageDescription="5-Pin USB Micro-B R/A Connector", PackageReference=ZX62R-B-5P, PartNumber=ZX62R-B-5P
J3: library part CMP-2000-05628-3, "CONN HEADER VERT 2POS 1.25MM", Ambient Temperature Range High=+85°C, Ambient Temperature Range Low=-40°C, Current Rating=1A, Manufacturer=Molex, Package=0, Temperature="-40°C to +85°C", Voltage Rating=125V, Automotive=No, Category=Conn, ComponentLink2Description=Datasheet, ComponentLink2URL=http://www.molex.com/webdocs/datasheets/pdf/en-us/0530470210_PCB_HEADERS.pdf, Conn Gender=Male, Conn Orientation=Vertical, Contact Material=Tin, Device Class L1=Connectors, Device Class L2="Headers and Wire Housings", Device Class L3=unset, Digikey Description="CONN HEADER VERT 2POS 1.25MM", Footprint Url=https://www.molex.com/pdm_docs/sd/530470210_sd.pdf, Height=4.4mm, Lead Free=Yes, Manufacturer Part Number=53047-0210, Mouser Description="1.25mm Pitch PicoBlade™ Wire-to-Board Header, Vertical, with Friction Lock, 2 Circuits", Number of Contacts=2, Number of Rows=1, Octopart=https://octopart.com/53047-0210-molex-276772, Pitch=1.25mm, RoHS=TRUE, Temperature Range High=+85°C, Temperature Range Low=-40°C
J4: library part CMP-47995-000002-1, "CONN PWR JACK 2.1X5.5MM SOLDER", Case/Package=SMD/SMT, Color=Black, Current Rating=5A, Package Quantity=120, Connector Type=Jack, Contact Material="Copper Alloy", Contact Plating=Tin, Gender=Male, Housing Color=Black, Housing Material=Thermoplastic, Mount="Surface Mount", Shielding=Unshielded, Termination=Solder
L4: library part IHLP1212AEERR47M11, "Inductor Power Shielded Wirewound 470nH 20% 100KHz 6.7A 15mOhm DCR 1212 T/R", Case/Package=1212, Current Rating=6.7A, DC Resistance (DCR)=15mR, Inductance=470nH, Inductance Tolerance=20%, Manufacturer="Vishay Dale", Manufacturer_Name=Vishay, Max Operating Temperature=125°C, Min Operating Temperature=-55°C, Mouser Part Number=70-IHLP1212AEERR47M1, Package Quantity=3000, Self Resonant Frequency=1MHz, Supplier Part Number 1=541-1330-1-ND, Test Frequency=100kHz, Arrow Part Number=IHLP1212AEERR47M11, Arrow Price/Stock=https://www.arrow.com/en/products/ihlp1212aeerr47m11/vishay, Category="Fixed Inductors", ComponentLink1Description=https://datasheet.ciiva.com/3081/lp12ae11-3081904.pdf?src-supplier=Avnet, ComponentLink1URL=https://datasheet.ciiva.com/3081/lp12ae11-3081904.pdf?src-supplier=Avnet, ComponentLink2Description=https://datasheet.ciiva.com/3081/lp12ae11-3081905.pdf?src-supplier=Avnet, ComponentLink2URL=https://datasheet.ciiva.com/3081/lp12ae11-3081905.pdf?src-supplier=Avnet, ComponentLink3Description=https://datasheet.ciiva.com/28651/1836116-28651335.pdf?src-supplier=Element14, ComponentLink3URL=https://datasheet.ciiva.com/28651/1836116-28651335.pdf?src-supplier=Element14, ComponentLink4Description=https://datasheet.ciiva.com/6692/ihlp-1212ae-11-6692009.pdf?src-supplier=Digi-Key, ComponentLink4URL=https://datasheet.ciiva.com/6692/ihlp-1212ae-11-6692009.pdf?src-supplier=Digi-Key, ComponentLink5Description=https://datasheet.ciiva.com/6692/ihlp-1212ae-11-6692010.pdf?src-supplier=Digi-Key, ComponentLink5URL=https://datasheet.ciiva.com/6692/ihlp-1212ae-11-6692010.pdf?src-supplier=Digi-Key, ComponentLink6Description=https://datasheet.ciiva.com/6692/ihlp-1212ae-11-6692011.pdf?src-supplier=Digi-Key, ComponentLink6URL=https://datasheet.ciiva.com/6692/ihlp-1212ae-11-6692011.pdf?src-supplier=Digi-Key, ComponentLink7Description=https://datasheet.ciiva.com/7649/lp12ae11-7649723.pdf?src-supplier=Element14, ComponentLink7URL=https://datasheet.ciiva.com/7649/lp12ae11-7649723.pdf?src-supplier=Element14, Core Material=Ferrite, Datasheet Link=http://www.mouser.com/datasheet/2/427/lp12ae11-244382.pdf, Depth=3.2mm, Height=1.5mm, Height - Seated (Max)=0.059inch, Lead Free="Lead Free", Length=3.6mm, Manufacturer Part Number=IHLP1212AEERR47M11, Manufacturer_Part_Number=IHLP1212AEERR47M11, Max DC Current=6.7A, Military Standard=Not, Mount="Surface Mount", Mouser Price/Stock=https://www.mouser.co.uk/ProductDetail/Vishay-Dale/IHLP1212AEERR47M11/?qs=hVaL6jEgczp7NPonCjkBaw%3D%3D, Number of Pins=2, Packaging="Tape and Reel", Pricing 1="1=1.26000, 10=1.17000, 25=1.08000, 50=0.90000, 100=0.84600, 250=0.75600, 500=0.64800, 1000=0.57600 (USD)", Radiation Hardening=No, Rated Current-Max=6.7A, REACH SVHC=Unknown, RMS Current (Irms)=6.7A, RoHS=Yes, RoHS Compliant=Yes, Saturation Current=6.7A, Series=IHLP-1212AE-11, Shielding=Shielded, Stock 1=46867, Supplier 1=Digi-Key, Termination=SMD/SMT, Tolerance=20%, Width=3mm
P1 P2: library part CMP-2000-05165-1, "Male Header, Pitch 2 mm, 1 x 4 Position, Height 6 mm, Tail Length 3.4 mm, -25 to 85 degC, RoHS, Bulk", Manufacturer=JST, Datasheet URL=http://datasheet.octopart.com/B4B-PH-K-S%28LF%29%28SN%29-JST-datasheet-10558886.pdf, Datasheet Version=Apr-09, Manufacturer URL=http://www.jst.com/home2.html, No of Positions=4, Pitch=2mm, Style/Orientation=StraightHeader/Plug, Termination=Crimp, Type=ShroudedHeader
R1 R2 R8 R9 R10: library part CMP-1012-00331-1, "27R 0.1W 1% 0603 (1608 Metric)  SMD", Case-EIA=0603, Case-Metric=1608, Power="0.1 W", Tolerance="1 %", Technology=SMT
R3 R5 R7: library part CMP-1012-00510-1, "1K 0.1W 1% 0603 (1608 Metric)  SMD", Case-EIA=0603, Case-Metric=1608, Power="0.1 W", Tolerance="1 %", Technology=SMT
R4 R15 R16 R17 R24 R43 R44 R45: library part CMP-1012-00001-1, "Jumper 0603 (1608 Metric)", Case-EIA=0603, Case-Metric=1608, Power=None, Technology=SMT, Tolerance=None
R6 R22 R23 R25: library part CMP-1012-00514-1, "1K1 0.1W 1% 0603 (1608 Metric)  SMD", Case-EIA=0603, Case-Metric=1608, Power="0.1 W", Tolerance="1 %", Technology=SMT
R11 R13 R14 R18 R20 R21 R26: library part CMP-1012-00623-1, "10K 0.1W 1% 0603 (1608 Metric)  SMD", Case-EIA=0603, Case-Metric=1608, Power="0.1 W", Tolerance="1 %", Technology=SMT
R12 R19 R27 R35 R37: library part CMP-1012-00397-1, "100R 0.1W 1% 0603 (1608 Metric)  SMD", Case-EIA=0603, Case-Metric=1608, Power="0.1 W", Tolerance="1 %", Technology=SMT
R36: "1 kOhms 0.1W, 1/10W J Lead Surface Mount Trimmer Potentiometer Cermet 1 Turn Top Adjustment", Package="1608 Bourns", Check_prices=https://www.snapeda.com/parts/TC33X-2-102E/Bourns/view-part/421910/?ref=eda, Digi-Key_Part_Number=TC33X-102ECT-ND, MF=Bourns, MP=TC33X-2-102E, Purchase-URL=https://pricing.snapeda.com/search/part/TC33X-2-102E/?ref=eda, SnapEDA_Link=https://www.snapeda.com/parts/TC33X-2-102E/Bourns/view-part/421910/?ref=snap
R39: library part CMP-1012-00810-1, "453K 0.1W 1% 0603 (1608 Metric)  SMD", Case-EIA=0603, Case-Metric=1608, Power="0.1 W", Tolerance="1 %", Technology=SMT
R41 R42: library part CMP-1012-00546-1, "2K2 0.1W 1% 0603 (1608 Metric)  SMD", Case-EIA=0603, Case-Metric=1608, Power="0.1 W", Tolerance="1 %", Technology=SMT
R46 R47: library part CMP-1012-00736-1, "100K 0.1W 1% 0603 (1608 Metric)  SMD", Case-EIA=0603, Case-Metric=1608, Power="0.1 W", Tolerance="1 %", Technology=SMT
SD1: library part CMP-2000-05825-1, "Micro SD Card, RA, -25 to 85 degC, 8-Pin SMD, RoHS, Tape and Reel", Current Rating=500mA, Manufacturer=Molex, Package Description="8-Pin Surface Mount Device, Body 11.95 x 11.4 mm, Pitch 1.1 mm", Voltage Rating=10VAC/DC, Brand=Molex, Card Type=microSD, Contact Material=PhosphorBronze, Contact Plating=Gold, Datasheet URL=http://www.molex.com/pdm_docs/sd/1040310811_sd.pdf, Datasheet Version="Rev. E, 04/2006", Height=1.42mm, Housing Material=LiquidCrystalPolymer(LCP), Insertion - Extraction Style=Push-Pull, Length=11.4mm, Manufacturer URL=http://www.molex.com/, Mating Cycles=10000, Mounting Technology=SurfaceMount, Mounting Type=Standard, Number of Contacts=8, Number of Rows=1Row, Orientation=RightAngle, Package Reference=104031-0811, Packaging=Reel, Pitch=1.1mm, Product=CardConnectors, Product Category=MemoryCardConnectors, RoHS=True, Series=104031, Termination Style=SMD
TP1 TP2 TP3 TP4 TP5 TP6 TP7 TP8 TP9 TP10 TP11 TP12 TP13 TP14 TP15 TP16 TP17 TP18 TP19 TP20 TP21 TP22 TP23 TP24: library part "0.1\" Pad-A.4"
U1: library part CMP-0248-00027-1, "FT234XD USB to BASIC UART IC, -40 to +85 degC, 12-Pin DFN, Pb-Free, Tape and Reel", Manufacturer=FTDI, ComponentLink1Description="Manufacturer URL", ComponentLink1URL=http://www.ftdichip.com/, ComponentLink2Description=Datasheet, ComponentLink2URL=http://www.ftdichip.com/Support/Documents/DataSheets/ICs/DS_FT234XD.pdf, DatasheetVersion="ver 1.1, Feb-2013", PackageDescription="12-Pin Dual Flat No-Lead, 3 x 3 mm Body, 0.45 mm Pitch, Exposed Pad", PackageReference=DFN-12, PackageVersion=Feb-13, PartNumber=FT234XD-R
U2: library part "Adafruit 2765", "JOYSTICK 10K OHM 2 AXIS TH", Manufacturer="Adafruit Industries", Manufacturer Part Number=2765, Resistance=10kR, Supplier Part Number 1=1528-1730-ND, ComponentLink1Description=https://media.digikey.com/pdf/Data%20Sheets/Adafruit%20PDFs/2765_Web.pdf?src-supplier=Digi-Key, ComponentLink1URL=https://media.digikey.com/pdf/Data%20Sheets/Adafruit%20PDFs/2765_Web.pdf?src-supplier=Digi-Key, Height=0.472inch, Length=0.707inch, Mount="Through Hole", Packaging=Bulk, Pricing 1="1=2.50000 (USD)", RoHS=Yes, Stock 1=17, Supplier 1=Digi-Key, Width=0.697inch
U3: "CONN HEADER 10POS UNSHD VERT T/H", Current Rating="10 A", Manufacturer="Amphenol / FCI", Supplier Part Number 1=609-3712-ND, Voltage Rating="125 V", Brand=FCI, ComponentLink1Description=https://datasheet.ciiva.com/1433/1079612-1433267.pdf, ComponentLink1URL=https://datasheet.ciiva.com/1433/1079612-1433267.pdf, ComponentLink2Description=https://datasheet.ciiva.com/409/20021111-409158.pdf, ComponentLink2URL=https://datasheet.ciiva.com/409/20021111-409158.pdf, ComponentLink3Description=https://datasheet.ciiva.com/5131/20021111-5131386.pdf, ComponentLink3URL=https://datasheet.ciiva.com/5131/20021111-5131386.pdf, ComponentLink4Description=https://datasheet.ciiva.com/9465/20021111-9465402.pdf, ComponentLink4URL=https://datasheet.ciiva.com/9465/20021111-9465402.pdf, Contact Material=Nickel, Contact Plating=Gold, Factory Pack Quantity=93, Housing Material=Plastic, Manufacturer Part Number=20021111-00010T4LF, Mating Post Length="3.05 mm", Mounting Angle=Vertical, Mounting Style="Through Hole", Number of Positions=10, Number of Positions / Contacts=10, Number of Rows=2, Packaging=Tube, Pitch="1.27 mm", Product Category="Headers & Wire Housings", Product Type=Headers, RoHS=Details, Series=Minitek, Stack Height="2.5 mm", Supplier 1=Digi-Key, Termination Post Length="2.3 mm", Termination Style="Through Hole", Type=Unshrouded
U4: "RF TXRX MODULE WIFI TRACE ANT", Current - Receiving=-, Frequency=2.4GHz, Manufacturer=Atmel, Manufacturer Part Number=ATSAMW25H18-MR510PB, Operating Temperature="-40°C ~ 85°C", Package / Case=Module, Power - Output=17dBm, Supplier Part Number 1=ATSAMW25H18-MR510PB-ND, Voltage - Supply="2.7 V ~ 4.2 V", Antenna Type="Integrated, Trace", Category="RF/IF and RFID", ComponentLink1Description=http://www.atmel.com/devices/ATSAMW25.aspx, ComponentLink1URL=http://www.atmel.com/devices/ATSAMW25.aspx, ComponentLink2Description=http://www.farnell.com/datasheets/1965115.pdf, ComponentLink2URL=http://www.farnell.com/datasheets/1965115.pdf, Current - Transmitting=-, Data Rate=65Mbps, Family="RF Transceiver Modules", Memory Size="256kB Flash, 32kB SRAM", Modulation=-, Mounting Type="Surface Mount", Packaging=Tray, Pricing 1="1=19.14 (USD)", Protocol=802.11b/g/n, RF Family/Standard=WiFi, Sensitivity=-95.5dBm, Serial Interfaces="SPI, UART", Series="Xplained Pro", Stock 1=120, Supplier 1=Digikey
U9: library part CMP-12733-000002-1, "IC AMP CLASS D MONO 2.5W 8MSOP", Manufacturer="Diodes Inc.", Max Junction Temp=+125°C, Max Supply Voltage=5.5V, Min Supply Voltage=2V, Nominal Supply Current=4mA, Package=MSOP-8, Power At Speaker R="2.5W @ 4Ω", Temperature="-40°C to +85°C", Temperature Range High=+85°C, Temperature Range Low=-40°C, Voltage Gain=24dB, Automotive=No, Category=IC, ComponentLink2Description=Datasheet, ComponentLink2URL=https://www.diodes.com/assets/Datasheets/PAM8302A.pdf, Device Class L1="Integrated Circuits (ICs)", Device Class L2="Linear ICs", Device Class L3="Amplifiers - Audio", Digikey Description="IC AMP CLASS D MONO 2.5W 8MSOP", Footprint Url=https://www.diodes.com/assets/Package-Files/MSOP-8.pdf, Height=1.1mm, Ipc Land Pattern Name=SOP65P490X110-8, Lead Free=Yes, Manufacturer Part Number=PAM8302AASCR, Mouser Description="Audio Amplifiers 2.5W MONO FILTERLESS CLASS-D AUDIO AMP", Number Of Channels=1, Octopart=https://octopart.com/pam8302aascr-diodes+inc.-29030473, RoHS=TRUE, Standoff Height=0.05mm
U10: "2.4V-5.5V input, 4A step-down converter with 1% Accuracy in 1.5mm x 1.5mm QFN 6-VSON-HR -40 to 125", Manufacturer="Texas Instruments", Supplier Part Number 1=296-TPS62827DMQRCT-ND, Category="Voltage Regulators - Switching", Manufacturer Part Number=TPS62827DMQR, Pricing 1="1=1.93000, 10=1.73000, 25=1.63240, 100=1.30590, 250=1.14268, 500=1.11004, 1000=0.88150 (USD)", RoHS=Yes, RoHS Compliant=Yes, Supplier 1=Digi-Key
U11: library part CMP-144040-000003-1, "SENSOR HUMI/TEMP I2C 2% SMD", Manufacturer=Sensirion, Max Supply Voltage=3.6V, Min Supply Voltage=1.62V, Operating Supply Current=0.3-900uA, Package=0, Temperature="-40°C to +125°C", Temperature Range High=+125°C, Temperature Range Low=-40°C, Accuracy=2%, Automotive=No, Category=IC, ComponentLink2Description=Datasheet, ComponentLink2URL=https://www.sensirion.com/fileadmin/user_upload/customers/sensirion/Dokumente/0_Datasheets/Humidity/Sensirion_Humidity_Sensors_SHTC3_Datasheet.pdf, Device Class L1=Sensors, Device Class L2="Temperature and Humidity Sensors", Device Class L3=unset, Digikey Description="SENSOR HUMI/TEMP I2C 2% SMD", Height=0.75mm, Interface=I2C, Ipc Land Pattern Name=DFN200X200X75-4, Lead Free=Yes, Manufacturer Part Number=SHTC3, Mouser Description="SHTC3 Series 0 to 100% RH 3.6 V Humidity and Temperature Sensor IC - DFN-4", Octopart=https://octopart.com/shtc3-sensirion-91912225, Resolution=16bits, RoHS=TRUE, Sensor Output=I2C
X1: library part CMP-0447-00001-2, "Crystal, 32.768 kHz, 12.5 pF, -40 to 85 degC, SMD Low Profile 3.2 x 1.5 x 0.9 mm, Tape and Reel", Equivalent Series Resistance (R1)="70 Kohm", Frequency="32.768 kHz", Frequency Tolerance @+25degC="+/- 20 ppm", Insulation Resistance (Min)="500 Mohm", Load Capacitance (CL)="12.5 pF", Manufacturer=Abracon, Operating Temperature="-40 to 85 degC", Q Value (Type)=30000, Shunt Capacitance (C0)="0.9 to 1.2 pF", ComponentLink1Description="Manufacturer URL", ComponentLink1URL=http://www.abracon.com/, ComponentLink2Description=Datasheet, ComponentLink2URL=http://www.abracon.com/Resonators/ABS07.pdf, ComponentLink3Description="Package Specification", ComponentLink3URL=http://www.abracon.com/Resonators/ABS07.pdf, DatasheetVersion=04.03.13, Drive Level (Type)="0.1 uW", Mounting Technology="Surface Mount", Operation Mode="Flexural Mode (Tuning Fork)", PackageDescription="2-Pin Hand Drawn, Body 3.2x1.5mm, Pitch 2.5mm", PackageReference=ABS07-2, Packing="Tape and Reel", PartNumber=ABS07-32.768KHz-T

## Free pads (board coordinates)
  round 141.73 hole 106.3 paste-102.36: HH1(92.52,2269.69) HH2(2269.68,2269.69) HH3(92.52,92.52) HH4(2269.68,92.52)

## Via types
v1: diameter 19.68, hole 7.87, Top Layer to Bottom Layer, 6 vias

## Nets (pads, with @x,y where several pads share a name; then routed paths per layer and width w, separated by ;. In a path a pad name is that pad's centre, name@x,y a point inside that pad or via, vN(x,y) a via of type N, cw(c..) or ccw(c..) an arc to the next point about the centre after c; other vN are vias at no path point)
3V3: C10.2 C11.2 C15.2 C18.2 C20.2 C22.2 R7.1 R11.2 R13.2 R14.2 R15.2 R17.1 R24.1 R26.2 R41.2 R42.2 R43.1 R44.1 SD1.4 TP6.1 TP12.1 TP24.1 U3.1 U4.7 U4.21 U4.33
3V3_JOY: R17.2 U2.3 U2.4
3V3OUT: C8.2 C46.2 L4.2 R15.1 R39.2
5V: C9.2 J4.2 R16.1 R46.1 TP5.1 U10.1 U10.6
"5V AMP": R16.2 R45.2
"AMP SIG": R21.2 R36.3 TP19.1 U4.31
AUDIO: R20.2 U4.22 U9.1
Button_INPUT: R18.2 U4.15
CBUS0: D5.2 U1.6
FLASH_MEM_SPI_SS: R13.1 SD1.2 TP11.1 U4.37
GND: B1.3 B1.4 B2.3 B2.4 B3.3 B3.4 C1.1 C2.1 C3.1 C4.1 C5.1 C6.1 C7.1 C9.1 C10.1 C11.1 C12.1 C13.1 C14.1 C15.1 C16.2 C18.1 C19.1 C20.1 C21.1 C22.1 C23.1 C46.1 D1.1 J1.5 J1.6 J1.7 J1.8 J1.9 J1.10 J1.11 J4.1 J4.3 P1.4 P2.4 R20.1 R21.1 R22.1 R25.1 R36.1 R47.1 SD1.6 SD1.10 SD1.11 SD1.12 TP3.1 TP13.1 U1.5 U1.13 U2.1 U2.6 U3.3 U3.5 U3.9 U4.0 U4.1 U4.10 U4.17 U4.20 U4.32 U4.42 U4.51 U9.7 U10.4 U11.4 | length 446.7
  Top Layer w8: J1.5 490.76,2136.24 494,2133
  Top Layer w10: U4.0@453.25,945.22 453.25,1031.13 540.57,1031.13 U4.0@540.57,945.22 ; U3.9 1504,787
  Top Layer w20: 494,2133 495,2132 553.28,2132 565,2120.28 565,2112
  other v1: 415.17,1754.28 454.54,1754.28 415.17,1789.71 454.54,1789.71 415.17,1825.14 454.54,1825.14
I2C_SCL_OUT: P1.1 P2.1 R42.1 TP22.1 U4.39 U11.2
I2C_SDA_OUT: P1.2 P2.2 R41.1 TP23.1 U4.38 U11.3
JOY_X: R6.2 R22.2 TP20.1 U4.36
JOY_Y: R23.2 R25.2 TP21.1 U4.41
MCU_LED: DS1.2 U4.16
MCU_RESET: C12.2 R11.1 R12.2 TP16.1 U3.10 U4.24
MCU_RX_UART_CLI: TP4.1 U1.7 U4.44
MCU_TX_UART_CLI: TP2.1 U1.10 U4.43
MEM_SPI_CLK: R10.2 SD1.5 TP10.1
MEM_SPI_MISO: R9.2 SD1.7 TP9.1
MEM_SPI_MOSI: R8.2 SD1.3 TP8.1
NetB1_1: B1.1 B1.2 R12.1
NetB2_1: B2.1 B2.2 R27.1
NetB3_1: B3.1 B3.2 D8.2
NetC8_1: C8.1 R39.1 R47.2 U10.3
NetC16_1: C16.1 R35.1
NetC17_1: C17.1 R37.1
NetC17_2: C17.2 R36.2
NetC21_2: C21.2 R18.1 R19.2
NetD5_1: D5.1 R3.1
NetD8_1: D8.1 R19.1
NetDS1_1: DS1.1 R7.2
NetL4_1: L4.1 U10.5
NetP1_3: P1.3 R43.2
NetP2_3: P2.3 R24.2
NetR35_2: R35.2 U9.4
NetR37_2: R37.2 U9.3
NetR44_2: R44.2 U11.1
NetR46_2: R46.2 U10.2
PA05_Reserve_Pin: C23.2 R26.1 R27.2 U4.35
PB02: TP17.1 U4.27
PB03: TP18.1 U4.28
RS: C7.2 R4.2 R5.2 U1.2
SD_CARD_DETECT: R14.1 SD1.9 TP7.1
SERCOM1_PAD2_SPI_MISO: R9.1 U4.8
SERCOM1_PAD2_SPI_MOSI: R8.1 U4.11
SERCOM1_PAD3_SPI_SCK: R10.1 U4.12
SPKR_NEG: J3.1 U9.8
SPKR_POS: J3.2 U9.5
SWCLK: TP15.1 U3.4 U4.25
SWDIO: TP14.1 U3.2 U4.26
USB_DATA_N: C5.2 D1.3 J1.2 R1.1 | length 265
  Top Layer w8: D1.3 D1.3@396.48,2093.93 ; R1.1@404,1961.5 417.72,1975.21 423.23,1975.21 427.91,1979.9 427.91,1991.21 424.88,1994.25 424.88,2065.53 D1.3@396.48,2093.93 ; J1.2 417.87,2180.81 417.87,2148.84 421.71,2145 421.71,2119.16 D1.3@396.48,2093.93
USB_DATA_P: C6.2 D1.2 J1.3 R2.1 | length 258.2
  Top Layer w8: J1.3@442.88,2176 439.71,2172.83 439.71,2125.5 D1.2@471.28,2093.93 ; R2.1 455.28,1973.21 450.6,1973.21 445.91,1977.9 445.91,2003.13 442.88,2006.17 442.88,2065.53 D1.2@471.28,2093.93 ; D1.2 D1.2@471.28,2093.93
USB_FTDI_DATA_N: R1.2 U1.1 | length 108.8
  Top Layer w8: U1.1 384.65,1834 393.35,1842.7 393.35,1843.06 399.21,1848.92 421.16,1848.92 427.5,1855.26 427.5,1878.1 422.81,1882.79 417.72,1882.79 R1.2
USB_FTDI_DATA_P: R2.2 U1.12 | length 106.5
  Top Layer w8: R2.2 455.28,1882.79 450.19,1882.79 445.5,1878.1 445.5,1853.61 450.19,1848.92 470.49,1848.92 476.35,1843.06 476.35,1842.7 485.05,1834 U1.12
VBUS: C2.2 D1.4 FB1.1 J1.1 | length 297.1
  Top Layer w8: 388.4,2137.6 J1.1
  Top Layer w20: 326,1992 365.41,1992 392.03,2018.62 394,2018.62 D1.4 394.51,2042.28 375.79,2061 363,2061 354,2070 354,2125.88 365.72,2137.6 388.4,2137.6
VCCIO: C1.2 R4.1 U1.3 U1.9
VDD: C19.2 R45.1 U9.6
VUSB: C3.2 C4.2 FB1.2 R3.2 R5.1 TP1.1 U1.4
XIN_32: C13.2 U4.29 X1.1
XOUT_3V3: R6.1 U2.2
XOUT_32: C14.2 U4.30 X1.2
YOUT_3V3: R23.1 U2.5
pads on no net: FD1. FD2. FD3. J1.4 J4. SD1.1 SD1.8 SD1.13 SD1.14 U1.8 U1.11 U3.6 U3.7 U3.8 U4.2 U4.3 U4.4 U4.5 U4.6 U4.9 U4.13 U4.14 U4.18 U4.19 U4.23 U4.34 U4.40 U4.45 U4.46 U4.47 U4.48 U4.49 U4.50 U9.2 U11.5

## Silkscreen, mask and mechanical layers (free items; w line width, h text height)
Mechanical 4:
  the board outline again, w20

## Text inside footprints (layer, text, board x,y; h text height)
J1: Mechanical 1 "Board edge" at 219.58,2342.34 h7.87 r180